# Altium PCB Xedk.PcbDoc
Units mil, origin at the board's own origin, x right, y up, seen from the top; angles counter-clockwise.
Board outline 5300 x 2200 mil, 2 copper layers (Top Layer, Bottom Layer); 55 components, 39 nets, 134 pads, 0 vias.
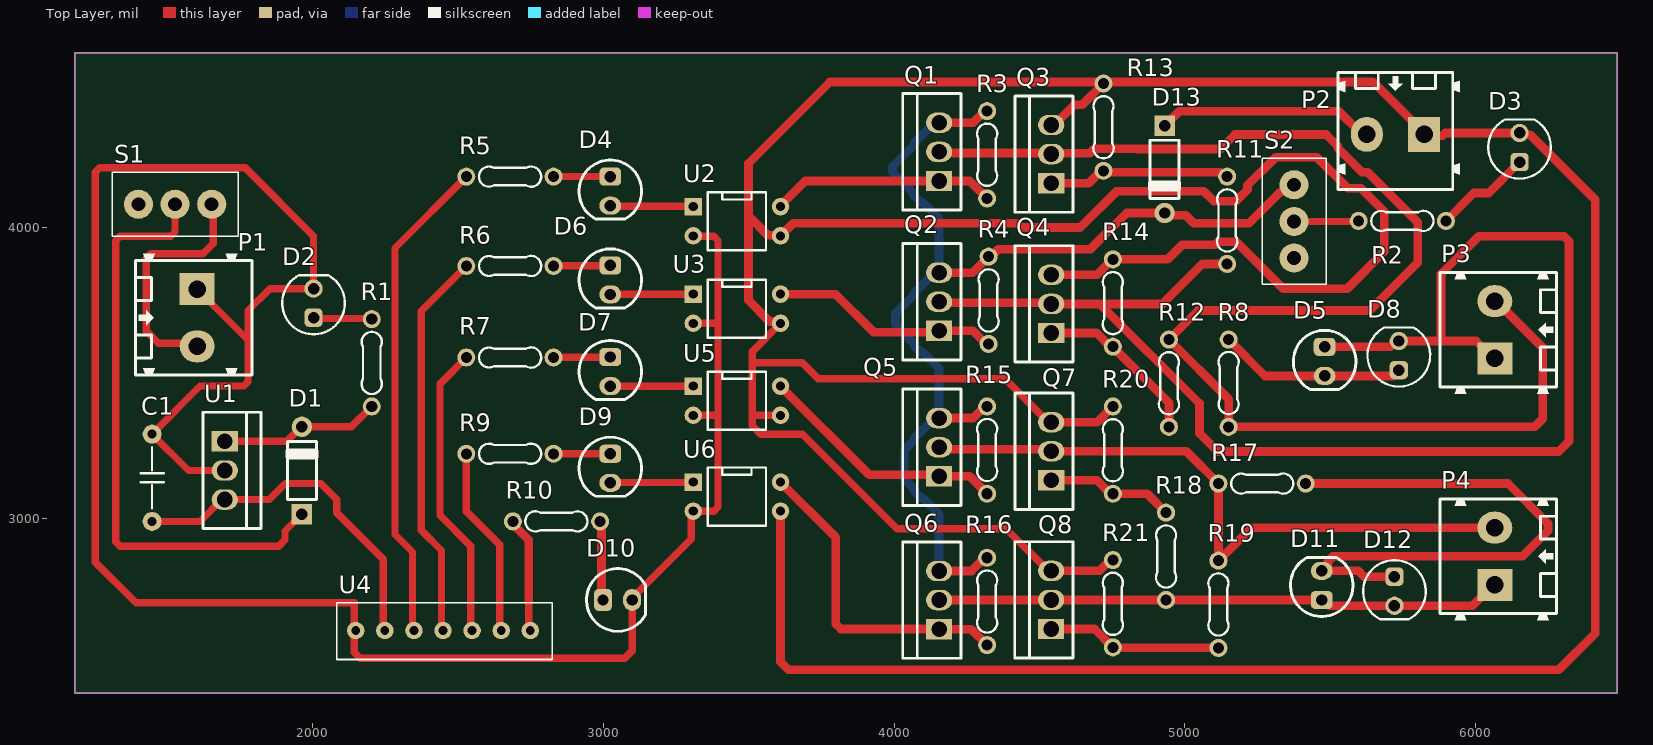
[diagram p0: Top Layer view]
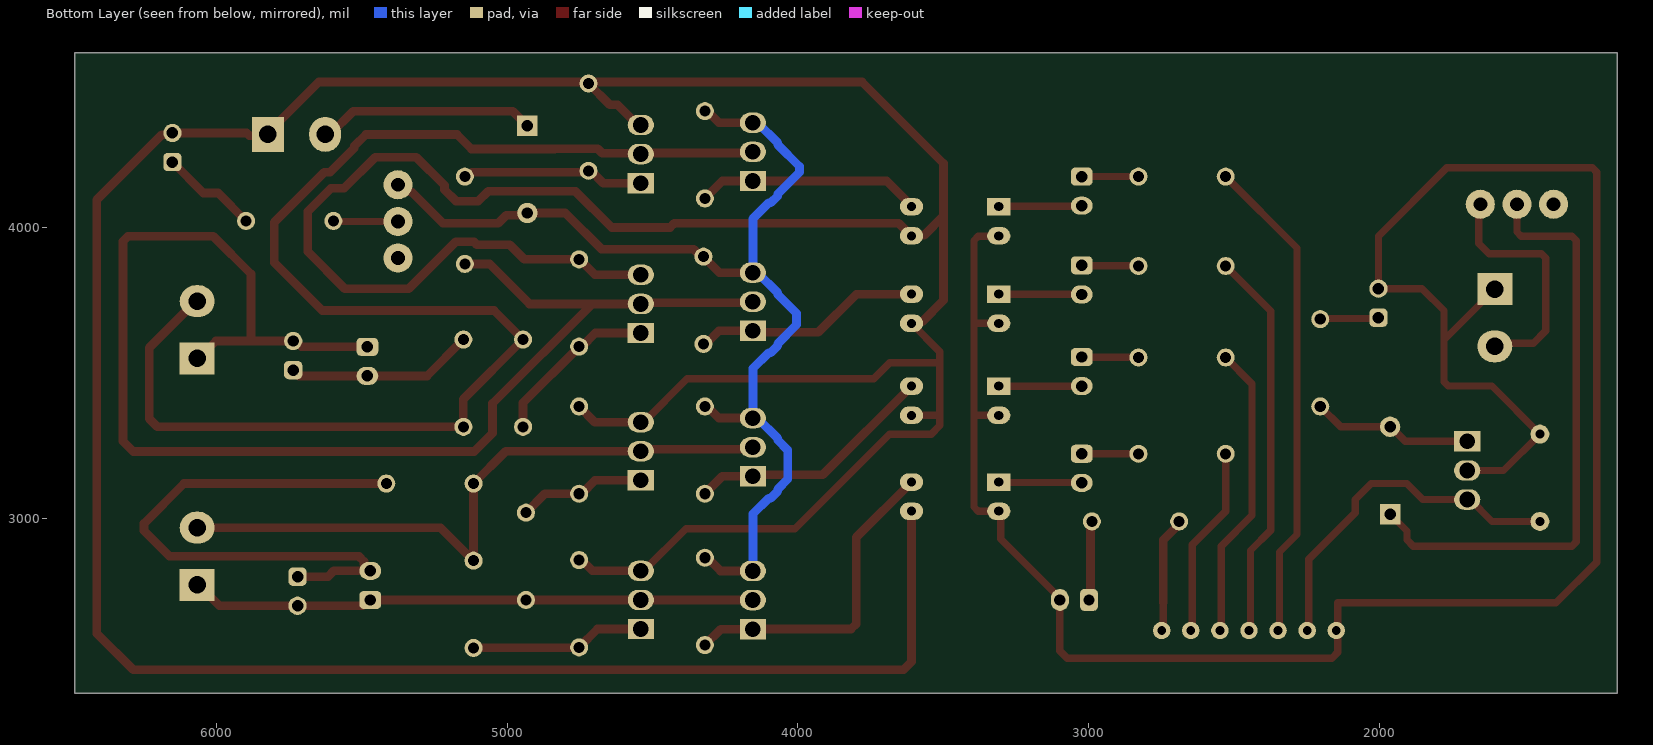
[diagram p1: Bottom Layer view, seen from below]
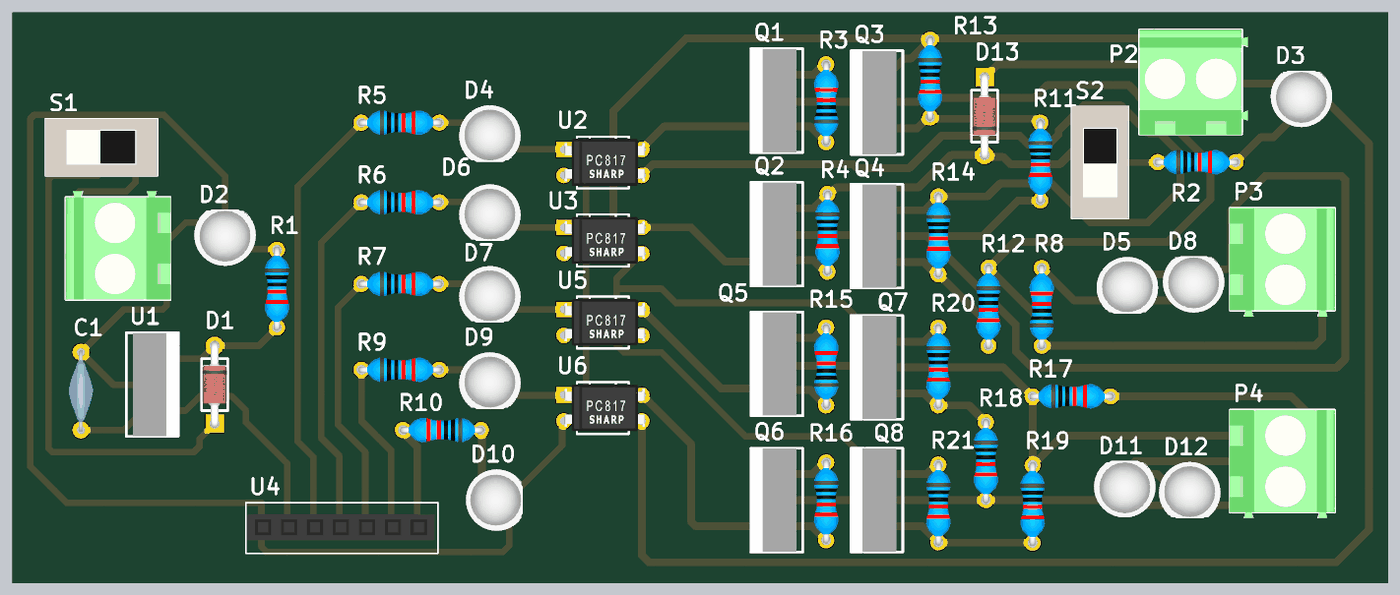
[diagram p2: 3D render of the assembled board from above, using the file's embedded part models]

## Layer stack, top to bottom
Top Solder: solder mask 0.4, Solder Resist, Dk 3.5
Top Layer: signal copper 1.4
Dielectric 1: dielectric 12.6, FR-4, Dk 4.8
Bottom Layer: signal copper 1.4
Bottom Solder: solder mask 0.4, Solder Resist, Dk 3.5

## Board outline
1185,2400 1185,4600 6485,4600 6485,2400

## Design rules (kind name [scope] priority, off if disabled: settings)
Clearance [All] p1: gap=25 ignorepadtopadclearanceinfootprint=FALSE
PolygonConnect [All] p1: connectstyle=Relief reliefconductorwidth=10 reliefentries=4 polygonreliefangle="90 Angle" airgapwidth=10
RoutingVias [All] p1: holewidth=28 width=50 viastyle="Through Hole" minholewidth=28 minwidth=50 maxholewidth=28 maxwidth=50
SilkToSilkClearance [All] p1: silktosilkclearance=1.2
SilkToSolderMaskClearance [IsPad] p1: minsilkscreentomaskgap=5 clearancetoexposedcopper=TRUE
SolderMaskExpansion [All] p1: expansion=4
Width [All] p1: maxlimit=30 minlimit=20 preferedwidth=25
28 further rules are at their usual default settings.

## Components (designator, comment, footprint, x,y, rotation, side; value= is the part's Value field where it differs from the comment)
C1 "C" "CAP Ceramic/W300" 1450,2990 r90 top
D1 "Diode" DO-41 1965,3015 r90 top
D2 "Led" "LED 5MM - GREEN" 2005,3740 r90 top
D3 "Led" "LED 5MM - GREEN" 6150,4275 r90 top
D4 "Led" "LED 5MM - RED" 3025,4125 r270 top
D5 "Led" "LED 5MM - RED" 5480,3540 r270 top
D6 "Led" "LED 5MM - RED" 3025,3820 r270 top
D7 "Led" "LED 5MM - RED" 3025,3505 r270 top
D8 "Led" "LED 5MM - GREEN" 5735,3560 r90 top
D9 "Led" "LED 5MM - RED" 3025,3172.46 r270 top
D10 "Led" "LED 5MM - RED" 3050,2720 r0 top
D11 "Led" "LED 5MM - RED" 5470,2770 r90 top
D12 "Led" "LED 5MM - GREEN" 5720,2750 r270 top
D13 "Diode" DO-41 4930,4350 r270 top
P1 "Header 2" HDR/Terminal/2/5mm 1605,3690 r270 top
P2 "Header 2" HDR/Terminal/2/5mm 5723.43,4320 r180 top
P3 "Header 2" HDR/Terminal/2/5mm 6065,3648.43 r90 top
P4 "Header 2" HDR/Terminal/2/5mm 6065,2870 r90 top
Q1 "IRF9Z24N (P-CH)" TO-220 4155,4160 r90 top
Q2 "IRF9Z24N (P-CH)" TO-220 4155,3645 r90 top
Q3 "IRF540N (N-CH)" TO-220 4540.32,4152.44 r90 top
Q4 "IRF540N (N-CH)" TO-220 4540.32,3637.44 r90 top
Q5 "IRF9Z24N (P-CH)" TO-220 4155,3145 r90 top
Q6 "IRF9Z24N (P-CH)" TO-220 4155,2619.63 r90 top
Q7 "IRF540N (N-CH)" TO-220 4540.32,3131.08 r90 top
Q8 "IRF540N (N-CH)" TO-220 4540,2620 r90 top
R1 "2k" "R 1/4W/300" 2205,3685 r270 top
R2 "2k" "R 1/4W/300" 5596.82,4022.62 r0 top
R3 "10k" "R 1/4W/300" 4320,4100 r90 top
R4 "10k" "R 1/4W/300" 4325,3900 r270 top
R5 "560" "R 1/4W/300" 2530,4175 r0 top
R6 "560" "R 1/4W/300" 2530,3867.83 r0 top
R7 "560" "R 1/4W/300" 2530,3553.28 r0 top
R8 "2k" "R 1/4W/300" 5150,3315 r90 top
R9 "560" "R 1/4W/300" 2530,3222.39 r0 top
R10 "1k" "R 1/4W/300" 2990,2990 r180 top
R11 "1k" "R 1/4W/300" 5145,4175 r270 top
R12 "1k" "R 1/4W/300" 4945,3615 r270 top
R13 "10k" "R 1/4W/300" 4720,4495 r270 top
R14 "10k" "R 1/4W/300" 4752.18,3890.68 r270 top
R15 "10k" "R 1/4W/300" 4320,3085 r90 top
R16 "10k" "R 1/4W/300" 4320,2865 r270 top
R17 "2k" "R 1/4W/300" 5115,3120 r0 top
R18 "1k" "R 1/4W/300" 4935,3020 r270 top
R19 "1k" "R 1/4W/300" 5115,2855 r270 top
R20 "10k" "R 1/4W/300" 4752.18,3385 r270 top
R21 "10k" "R 1/4W/300" 4752.18,2857.07 r270 top
S1 "ON-ON" SWITCH_SPDT_SLIDER 1529,4080 r180 top
S2 "ON-ON" SWITCH_SPDT_SLIDER 5375,4021 r270 top
U1 "7805" TO-220 1700,3265 r270 top
U2 "PC817B" "DIP 4" 3310,4071.55 r270 top
U3 "PC817B" "DIP 4" 3310,3770.96 r270 top
U4 "RF-315" "RF-315 7 pins" 2580,2335 r90 top
U5 "PC817B" "DIP 4" 3310,3454.76 r270 top
U6 "PC817B" "DIP 4" 3310,3125 r270 top

## Footprints (in the part's own frame and the unit in brackets; to place one, negate y for a bottom-side part, rotate by r counter-clockwise, add the part's x,y. Pads: shape width x height; smd on the part's side, far side on the other; paste and mask are expansions set on the pad)
"CAP Ceramic/W300" [mil]
  round 65 hole 31: 1(0,0) 2(300,0)
  silkscreen extent 45,-40 255,40, body extent -8,-47 307,47, height 340
"DIP 4" [mil] "DIP IC (2.54mm), 4 pins"
  rect 60x60 / inner round 60 / far side rect 60x80 hole 31: 1(0,0)
  round 60 / inner round 60 / far side oval 60x80 hole 31: 2(100,0) 3(100,300) 4(0,300)
  silkscreen extent -50,50 150,250, body extent -41,2 140,313, height 276
DO-41 [mil]
  rect 70x70 hole 39.37: 1(0,0)
  round 70 hole 39.37: 2(300,0)
  silkscreen extent 50,-55 250,55, body extent -15,-47 315,47, height 99
HDR/Terminal/2/5mm [mil] "Header 2, 2 pin, hight 400mil, Pin to Pin 200mil, Colour Green"
  rect 110x120 hole 60: 1(-98.43,0)
  oval 110x120 hole 60: 2(98.43,0)
  silkscreen extent -220,-213 197,189, body extent -220,-215 197,191, height 559
"LED 5MM - GREEN" [mm]
  rrect50% 1.6x1.6 hole 1: 1(-1.27,0)
  round 1.6 hole 1: 2(1.27,0)
  silkscreen extent -2.71,-2.73 2.44,2.73, body extent -2.98,-3.01 2.44,3.01, height 8.63
"LED 5MM - RED" [mil]
  rrect50% 62x75 hole 39: 1(-50,0)
  oval 62x75 hole 39: 2(50,0)
  silkscreen extent -107,-108 96,108, body extent -117,-118 96,119, height 340
"R 1/4W/300" [mil] "Through hole resitor, axial 300mils, 1/4W"
  round 62 hole 38: 1(0,0) 2(300,0)
  silkscreen extent 44,-35 257,35, body extent -12,-47 312,47, height 97
"RF-315 7 pins" [mil]
  round 60 hole 30: 1(280,430) 2(280,330) 3(280,230) 4(280,130) 5(280,30) 6(280,-70) 7(280,-170)
  silkscreen extent 180,-245 375,495, body extent 230,-232 330,488, height 335
SWITCH_SPDT_SLIDER [mil] "TE Connectivity SLS121PC04 SPDT slider"
  round 100 hole 48: 1(-126,0) 2(0,0) 3(126,0)
  silkscreen extent -217,-110 217,110, body extent -216,-110 217,110, height 394
TO-220 [mil]
  rect 70x90 hole 54: 1(0,0)
  oval 70x90 hole 54: 2(100,0) 3(200,0)
  silkscreen extent -100,-75 300,125, body extent -100,-50 300,130, height 730

## Part data
C1: library part "Capacitor NP", "Capacitor non-pol"
D1 D13: "Default Diode"
D2 D3 D4 D5 D6 D7 D8 D9 D10 D11 D12: "Typical LED"
P1 P2 P3 P4: "Header, 2-Pin"
Q1 Q2 Q5 Q6: library part "Mosfet P", "Mosfet P"
Q3 Q4 Q7 Q8: library part "Mosfet N", "Mosfet N"
R1 R2 R3 R4 R5 R6 R7 R8 R9 R10 R11 R12 R13 R14 R15 R16 R17 R18 R19 R20 R21: library part Resistor, "Resistor"
S1 S2: library part SW_THD_SPDT_On-On, "Switch THD vertical toggle SPDT", Contact Rating @ Voltage="0.25A @ 125VAC", Manufacturer 1="TE Connectivity", Manufacturer Part Number 1=SLS121PC04, Supplier Part Number 1=450-1598-ND, Circuit=SPDT, Mounting Type="PCB mount", SCDType=spec, Supplier 1=Digi-Key, Switch Function=On-On
U1: library part 78xx, "LDO Fixed Voltage regulator"
U2 U3 U5 U6: library part "Opto PC817B"

## Nets (pads, with @x,y where several pads share a name; then routed paths per layer and width w, separated by ;. In a path a pad name is that pad's centre, name@x,y a point inside that pad or via, vN(x,y) a via of type N, cw(c..) or ccw(c..) an arc to the next point about the centre after c; other vN are vias at no path point)
+5: C1.1 U1.3 U4.2 | length 1232.9
  Top Layer w25: C1.1 1615,2990 1690,3065 U1.3 1852.89,3065 1907.89,3120 2030,3120 2085,3065 2085,3020 2245,2860 U4.2@2245,2610
+8: D13.2 Q1.3 Q2.3 Q5.3 Q6.3 R3.2 R4.1 R15.2 R16.1 S2.1 | length 3879.1
  Top Layer w30: Q5.3@4134.18,3345 Q5.3 4271.34,3345 4311.34,3385 R15.2 ; Q6.3 4265.97,2819.63 4311.34,2865 R16.1 ; Q2.3 4270,3845 R4.1 4333.66,3900 4358.66,3925 4675,3925 4800,4050 D13.2 4937.65,4042.35 5002.65,4042.35 5030,4015 5220,4015 5326.32,4121.32 5330.38,4121.32 5356.06,4147 S2.1 ; Q1.3 4271.34,4360 4311.34,4400 R3.2
  Bottom Layer w30: Q6.3 4155,3015.5 4100.5,3070 4093.43,3070 4070,3093.43 4070,3100.5 4035,3135.5 4035,3235 4070,3270 4070,3276.07 4138.93,3345 Q5.3 4155,3515.5 4100.5,3570 4093.43,3570 4070,3593.43 4070,3600.5 4005,3665.5 4005,3705 4070,3770 4070,3776.07 4138.93,3845 Q2.3 4155,4030.5 4100.5,4085 4093.43,4085 4070,4108.43 4070,4115.5 3995,4190.5 3995,4210 4070,4285 4070,4291.07 4138.93,4360 Q1.3
BW_LEFT: Q2.1 R4.2 U3.4 | length 790
  Top Layer w30: U3.4 3799.04,3770.96 3930,3640 4150,3640 Q2.1 4271.34,3645 4316.34,3600 R4.2
BW_RIGHT: Q6.1 R16.2 U6.4 | length 1128
  Top Layer w30: U6.4@3615.74,3130.74 U6.4 3800,2935 3800,2637.57 3817.57,2620 4154.63,2620 Q6.1 4265.37,2619.63 R16.2 R16.2@4320,2561.31
FW_LEFT: Q1.1 R3.1 U2.4 | length 773.5
  Top Layer w30: U2.4 3610,4075 3695,4160 Q1.1 4260,4160 R3.1
FW_RIGHT: Q5.1 R15.1 U5.4 | length 863.2
  Top Layer w30: U5.4 3914.76,3150 4150,3150 Q5.1 4260,3145 R15.1
GND: D3.2 P2.1 Q3.3 Q4.3 Q7.3 Q8.3 R13.1 R14.1 R20.1 R21.1 U2.3 U3.3 U5.3 U6.3 | length 16133.6
  Top Layer w25: U5.3 3512.5,3354.76 ; U3.3 3512.5,3573.46 3512.5,3535 ; Q8.3 4530,2820 4385,2965 4010,2965 3685.3,3289.7 3542.2,3289.7 3512.5,3319.41 3512.5,3354.76 ; Q7.3 4530.32,3331.08 4381.4,3480 3740,3480 3685,3535 3512.5,3535 ; 3512.5,3354.76 3512.5,3535
  Top Layer w30: U6.3 3610,2507.57 3637.57,2480 6285,2480 6410,2605 6410,4095 6186.31,4318.69 6156.31,4318.69 D3.2 5895,4325 5885,4315 5826.85,4315 P2.1 5821.85,4325 5646.85,4500 R13.1@4725,4500 ; U3.3 3604.26,3676.7 3573.3,3676.7 3500,3750 3500,4040 ; Q8.3 4706.45,2820 4743.52,2857.07 R21.1 ; Q7.3 4698.26,3331.08 R20.1 ; Q4.3 4697.93,3837.44 4751.17,3890.68 R14.1 4940.68,3890.68 4991,3941 5103.52,3941 5113.52,3951 5176.48,3951 5221,3906.48 5337.48,3790 5557.43,3790 5685,3917.57 5685,4055 5605.11,4134.89 5560.26,4134.89 5453.15,4242 5312,4242 5215,4145 5215,4130 5175,4090 5099.5,4090 5064.5,4125 4765,4125 4640,4000 4440,4000 4425,4015 3653.45,4015 U2.3 3607.74,3973.81 3566.19,3973.81 3500,4040 ; Q3.3 4550.32,4352.44 4620.2,4422.32 4647.32,4422.32 R13.1 R13.1@4725,4500 ; 3500,4040 3500,4220 3780,4500 R13.1@4725,4500
GND_DIGITAL: C1.2 D2.2 D10.2 P1.1 U1.2 U2.2 U3.2 U4.1 U5.2 U6.2 | length 7753.9
  Top Layer w25: P1.1 1610,3788.43 1652.5,3745.93 1652.5,3740.93 1780,3613.43 ; U1.2 1575,3165 C1.2 1615,3455 1765.36,3455 1780,3469.64 1780,3613.43 ; U4.1@2145,2610 2145,2540 2165,2520 3075,2520 3100,2545 D10.2 3100,2726.5 3303.3,2929.8 3303.3,3018.3 U6.2 3380.36,3025 3395,3039.64 3395,3354.76 ; U4.1@2145,2615 2145,2710 1395,2710 1255,2850 1255,4190.36 1269.64,4205 1770,4205 2005,3970 D2.2 1855,3790 1780,3715 1780,3613.43 ; U5.2 3395,3354.76 ; U3.2 3395,3670.96 ; U2.2 3311.55,3970 3380.36,3970 3395,3955.36 3395,3670.96 ; 3395,3354.76 3395,3670.96
NetD1_1: D1.1 S1.2 | length 2056.2
  Top Layer w25: S1.2 1529,3984.64 1514.36,3970 1339.64,3970 1325,3955.36 1325,2920 1340,2905 1885,2905 1907.14,2927.14 1907.14,2957.14 D1.1
NetD1_2: D1.2 R1.2 U1.1 | length 554.7
  Top Layer w25: U1.1 1912.47,3265 1962.47,3315 D1.2 2135,3315 R1.2
NetD2_1: D2.1 R1.1 | length 202.1
  Top Layer w25: D2.1 2007.5,3687.5 2202.5,3687.5 R1.1
NetD3_1: D3.1 R2.2 | length 337
  Top Layer w30: R2.2 5992.95,4118.76 6043.76,4118.76 D3.1
NetD4_1: D4.1 R5.2 | length 195
  Top Layer w25: R5.2 D4.1
NetD4_2: D4.2 U2.1 | length 286.4
  Top Layer w25: D4.2 3026.73,4073.27 3308.27,4073.27 U2.1
NetD5_1: D5.1 D8.2 P3.1 Q2.2 Q4.2 R11.2 | length 4986
  Top Layer w30: Q2.2 4158.78,3741.22 4536.54,3741.22 Q4.2 4707.56,3737.44 ; R11.2 5060,3875 4922.44,3737.44 4707.56,3737.44 ; D5.1 5706.07,3590 5726.07,3610 D8.2 5885,3610 ; P3.1 6060,3550 6000,3610 5885,3610 ; 4707.56,3737.44 5050,3395 5050,3292.57 5112.57,3230 6285,3230 6320,3265 6320,3952.43 6302.43,3970 6010,3970 5880,3840 5880,3615 5885,3610
NetD5_2: D5.2 D8.1 R8.2 | length 645.1
  Top Layer w30: R8.2 5275,3490 D5.2 5714.6,3490 5734.6,3510 D8.1
NetD6_1: D6.1 R6.2 | length 195.9
  Top Layer w25: R6.2 2831.08,3868.92 3023.92,3868.92 D6.1
NetD6_2: D6.2 U3.1 | length 285.4
  Top Layer w25: D6.2 3025.48,3770.48 3309.52,3770.48 U3.1
NetD7_1: D7.1 R7.2 | length 195.7
  Top Layer w25: R7.2 2830.86,3554.14 3024.14,3554.14 D7.1
NetD7_2: D7.2 U5.1 | length 285.1
  Top Layer w25: D7.2 3025.12,3454.88 3309.88,3454.88 U5.1
NetD9_1: D9.1 R9.2 | length 195
  Top Layer w25: R9.2 D9.1@3024.97,3222.43
NetD9_2: D9.2 U6.1 | length 286.1
  Top Layer w25: D9.2 3026.27,3123.73 3308.73,3123.73 U6.1
NetD10_1: D10.1 R10.1 | length 274.1
  Top Layer w30: R10.1 2995,2985 2995,2725 D10.1
NetD11_1: D11.1 D12.2 P4.1 Q6.2 Q8.2 R18.2 | length 1948.1
  Top Layer w30: Q6.2 4155.19,2719.81 4539.81,2719.81 Q8.2 R18.2 D11.1 5476.77,2720 5496.77,2700 D12.2 5988.43,2700 6060,2771.57 P4.1
NetD11_2: D11.2 D12.1 R17.2 | length 2013.6
  Top Layer w30: R17.2 6110,3120 6247.57,2982.43 6247.57,2957.57 6160,2870 5509.13,2870 5491.55,2852.43 5491.55,2843.71 5470,2822.16 D11.2 5595.44,2820 5615.44,2800 D12.1
NetD13_1: D13.1 P2.2 | length 748.8
  Top Layer w30: D13.1 4980,4400 5528.35,4400 5608.35,4320 P2.2
NetP3_2: P3.2 Q1.2 Q3.2 R8.1 R12.1 | length 4856.7
  Top Layer w30: Q1.2 4158.78,4256.22 4536.54,4256.22 4537.76,4255 4672.52,4255 4688.52,4271 4835.58,4271 4836.58,4270 5121.89,4270 5171.89,4320 5485,4320 5525,4280 5525,4273.58 5608.69,4189.89 5627.89,4189.89 5800,4017.78 5800,3880 5635,3715 5045,3715 R12.1 5150,3410 R8.1 ; R8.1@5152.5,3312.5 5155,3315 6202.43,3315 6230,3342.57 6230,3586.85 6070,3746.85 P3.2
NetP4_2: P4.2 Q5.2 Q7.2 R17.1 R19.1 | length 2273.8
  Top Layer w30: Q5.2 4161.96,3238.04 4533.36,3238.04 Q7.2 5003.92,3231.08 R17.1 R19.1 5228.43,2968.43 P4.2
NetQ3_1: Q3.1 R11.1 R13.2 | length 630.6
  Top Layer w30: Q3.1 4668.78,4152.44 4711.34,4195 4728.66,4195 4733.66,4190 5121.34,4190 5136.34,4175 R11.1
NetQ4_1: Q4.1 R12.2 R14.2 | length 586.8
  Top Layer w30: Q4.1 4696.75,3637.44 4743.52,3590.68 R14.2 4945,3397.85 R12.2
NetQ7_1: Q7.1 R18.1 R20.2 | length 440.7
  Top Layer w30: Q7.1 4697.44,3131.08 4743.52,3085 R20.2 4870,3085 R18.1
NetQ8_1: Q8.1 R19.2 R21.2 | length 601.9
  Top Layer w30: Q8.1 4689.24,2620 R21.2 4753.21,2556.03 5113.97,2556.03 R19.2
NetR2_1: R2.1 S2.2 | length 231.1
  Top Layer w25: S2.2 5595.19,4021 R2.1
  Top Layer w30: R2.1@5588.16,4022.62 R2.1
NetR5_1: R5.1 U4.3 | length 1691.3
  Top Layer w25: U4.3@2345,2610 2345,2885 2285,2945 2285,3930 R5.1
NetR6_1: R6.1 U4.4 | length 1351
  Top Layer w25: U4.4@2445,2610 2445,2890 2375,2960 2375,3712.83 R6.1
NetR7_1: R7.1 U4.5 | length 1024.1
  Top Layer w25: R7.1 2440,3463.28 2440,3010 2545,2905 U4.5@2545,2610
NetR9_1: R9.1 U4.6 | length 660
  Top Layer w25: R9.1 2530,3025 2645,2910 U4.6@2645,2610
NetR10_2: R10.2 U4.7 | length 406.3
  Top Layer w25: U4.7@2745,2610 2745,2710
  Top Layer w30: R10.2@2687.5,2987.5 R10.2 2690,2981.34 2745,2926.34 2745,2710
VCC: P1.2 S1.1 | length 848
  Top Layer w25: P1.2 1594.07,3602.5 1472.5,3602.5 1430,3645 1430,3895.36 1444.64,3910 1625,3910 1660,3945 S1.1@1660,4095
pads on no net: S1.3 S2.3

## Keep-outs
Top Layer:
  lines w5.91: 1185,2400 1185,4600 6485,4600 6485,2400 1445,2400 1185,2400